# EAGLE board SPEKTRUM_Current_Usage_Sense REV_A (EAGLE 7.1.0)
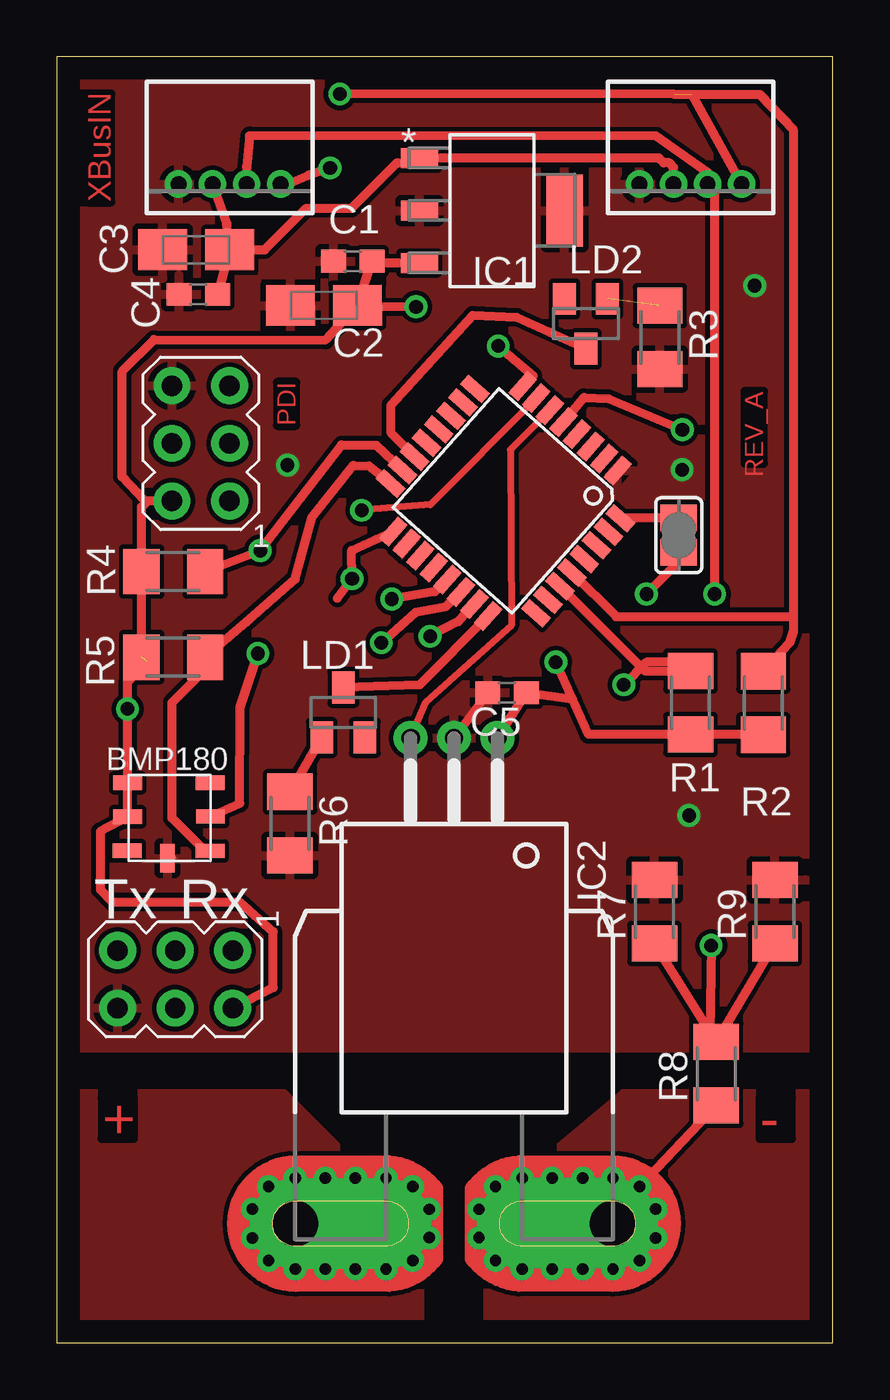
[diagram p0: board, top side]
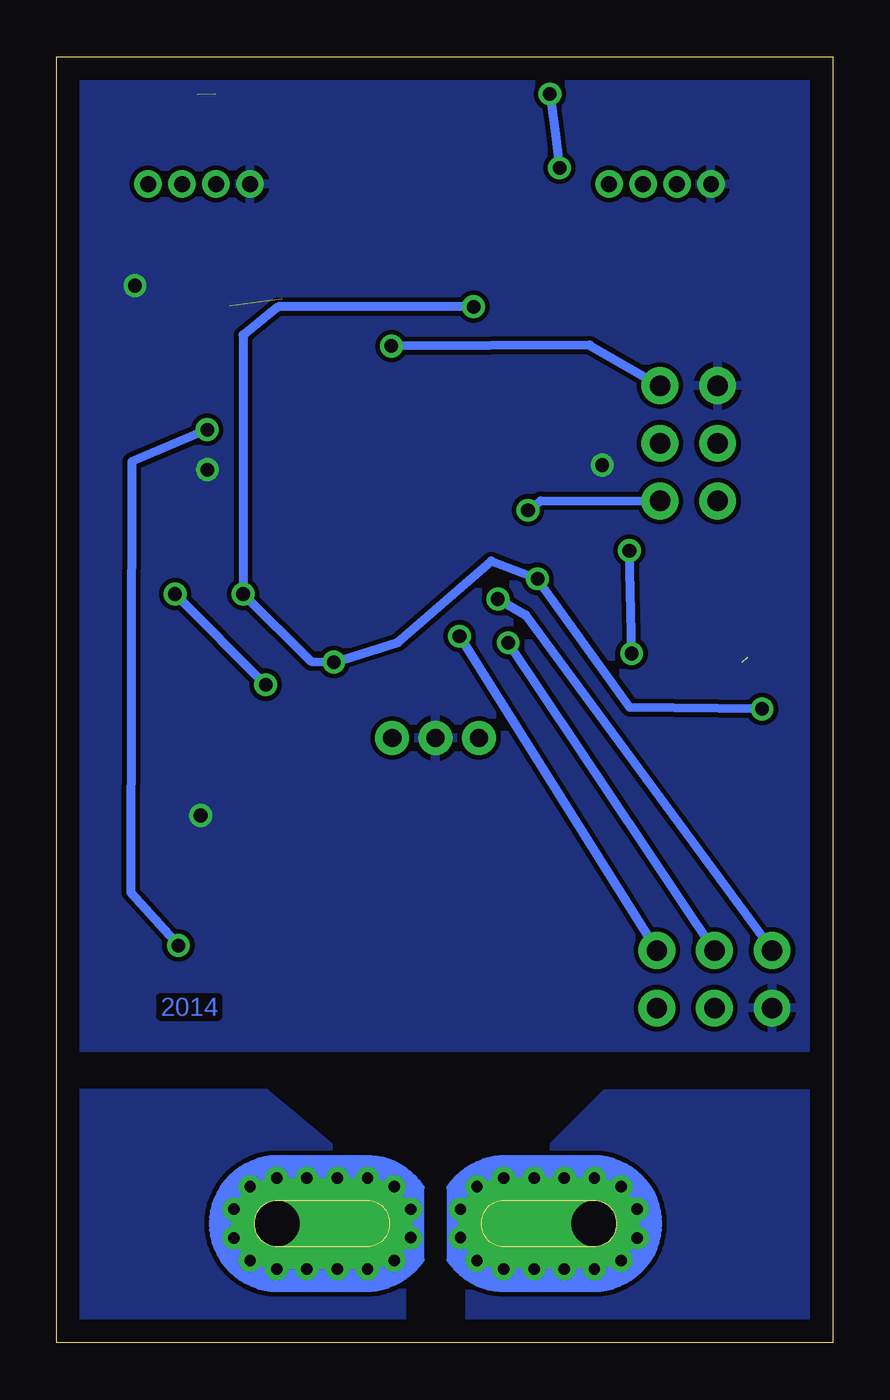
[diagram p1: board, bottom side, seen from below]

Size 34.22 x 56.68 mm. Coordinates in mm from the lower left corner, seen from the top.
Outline: 0,0 34.22,0 34.22,56.68 0,56.68 0,0
Copper layers (1*16): Top 0.035mm / dielectric 1.5mm / Bottom 0.035mm
Design rules "default *": minimum track width 10mil, minimum drill 17mil, track to track 8mil, track to pad 8mil, pad to pad 8mil, via to via 8mil, smd to smd 8mil, copper to edge 40mil, drill to drill 8mil, minimum pad ring 10mil, minimum via ring 8mil, stop-mask expansion 4mil, vias tented up to drill 0mil, thermal gap 10mil

## Footprints (pad centres in the part's own frame; a part is rotated, then mirrored left to right if it is on the bottom)
TQFP32-08 = smd 1.27 x 0.559: 1 -4.293,2.8; 2 -4.293,2; 3 -4.293,1.2; 4 -4.293,0.4; 5 -4.293,-0.4; 6 -4.293,-1.2; 7 -4.293,-2; 8 -4.293,-2.8; 17 4.293,-2.8; 18 4.293,-2; 19 4.293,-1.2; 20 4.293,-0.4; 21 4.293,0.4; 22 4.293,1.2; 23 4.293,2; 24 4.293,2.8 | smd 0.559 x 1.27: 9 -2.8,-4.293; 10 -2,-4.293; 11 -1.2,-4.293; 12 -0.4,-4.293; 13 0.4,-4.293; 14 1.2,-4.293; 15 2,-4.293; 16 2.8,-4.293; 25 2.8,4.293; 26 2,4.293; 27 1.2,4.293; 28 0.4,4.293; 29 -0.4,4.293; 30 -1.2,4.293; 31 -2,4.293; 32 -2.8,4.293
C0603 = smd 1.1 x 1: 1 -0.85,0; 2 0.85,0
A/3216-18W = smd 2.15 x 1.8: + 1.475,0; - -1.475,0
SOT230P700X180-4N = smd 1.626 x 0.889: 1 -3.2,2.311; 2 -3.2,0; 3 -3.2,-2.311 | smd 1.626 x 3.175: 4 3.2,0
CB-PFF = drill 0.8 pad 1.5: 1 -1.91,-21.4; 2 0,-21.4; 3 1.91,-21.4 | drill 2 pad 4 offset: IP+ 7,0; IP- -7,0 | drill 0.5 pad 0.9: IP+@2 8.89,0.635; IP+@3 8.89,-0.635; IP+@4 8.175,-1.625; IP+@5 7,-2; IP+@6 5.675,-2; IP+@7 4.35,-2; IP+@8 3,-2; IP+@9 1.825,-1.625; IP+@10 1.1,-0.625; IP+@11 1.1,0.625; IP+@12 1.825,1.625; IP+@13 3,2; IP+@14 4.35,2; IP+@15 5.675,2; IP+@16 7,2; IP+@17 8.175,1.625; IP-@2 -8.89,0.635; IP-@3 -8.89,-0.635; IP-@4 -8.175,-1.625; IP-@5 -7,-2; IP-@6 -5.675,-2; IP-@7 -4.325,-2; IP-@8 -3,-2; IP-@9 -1.825,-1.625; IP-@10 -1.1,-0.625; IP-@11 -1.1,0.625; IP-@12 -1.825,1.625; IP-@13 -3,2; IP-@14 -4.325,2; IP-@15 -5.675,2; IP-@16 -7,2; IP-@17 -8.175,1.625
AVRISP = drill 0.9 pad 1.626: 1 -1.27,2.54; 2 1.27,2.54; 3 -1.27,0; 4 1.27,0; 5 -1.27,-2.54; 6 1.27,-2.54
SOT23 = smd 1 x 1.4: 1 -0.95,-1.1; 2 0.95,-1.1; 3 0,1.1
M1206 = smd 1.6 x 2: 1 -1.4,0; 2 1.4,0
SJ = smd 1.168 x 1.6: 1 -0.762,0; 2 0.762,0
BMP180_LGA7 = smd 0.635 x 1.27: P1 1.435,-1.975; P2 -0.055,-1.955; P3 -1.555,-1.955; P4 -1.545,1.685; P5 -0.065,1.695; P6 1.455,1.685 | smd 1.27 x 0.635: P7 1.775,-0.195
S4B-ZR = drill 0.7 pad 1.1: 1 -2.25,0; 2 -0.75,0; 3 0.75,0; 4 2.25,0

## Placement (x,y rotation side)
ATXMEGA32E5  [TQFP32-08]  19.78,37.1 228.3 top
C1  100nF  [C0603]  13.05,47.67 180 top
C2  1uF  [A/3216-18W]  11.78,45.72 0.3 top
C3  4.7uF  [A/3216-18W]  6.15,48.17 0 top
C4  100nF  [C0603]  6.24,46.21 180 top
C5  100nF  [C0603]  19.85,28.65 180 top
IC1  MCP1826S-3302E/DB  [SOT230P700X180-4N]  19.19,49.9 0 top
IC2  ACS758LCB-100U-PFF-T  [CB-PFF]  17.52,5.25 180 top
ISP1  AVRISP-6  [AVRISP]  6.35,39.64 180 top
ISP2  AVRISP-6  [AVRISP]  5.22,16.02 270 top
LD1  PL006-WCR21  [SOT23]  12.63,27.78 0 top
LD2  PL006-WCR21  [SOT23]  23.33,44.91 180 top
R1  4.7K  [M1206]  27.94,28.21 270 top
R2  4.7K  [M1206]  31.15,28.2 270 top
R3  [M1206]  26.59,44.31 270 top
R4  4.7K  [M1206]  5.14,33.99 180 top
R5  4.7K  [M1206]  5.14,30.22 180 top
R6  [M1206]  10.28,22.88 270 top
R7  470  [M1206]  26.35,19 90 top
R8  4.7K  [M1206]  29.07,11.86 90 top
R9  470  [M1206]  31.66,19 90 top
SJ1  [SJ]  27.42,35.59 90 top
U$1  BMP180  [BMP180_LGA7]  5.08,23.13 270 top
X-BUS1  S4B-ZR  [S4B-ZR]  7.62,51.07 180 top
X-BUS2  S4B-ZR  [S4B-ZR]  27.94,51.07 180 top

## Library data of the parts
ATXMEGA32E5 = atmega-atxmega
C1-C5 = rcl
IC1 = microchip_ldo; MPN: MCP1826S-3302E/DB; OC_FARNELL: 1578424; OC_NEWARK: 27M0037; PACKAGE: SOT-223-3; SUPPLIER: Microchip
IC2 = allegro; MPN: ACS758LCB-100U-PFF-T; OC_FARNELL: 1718998; OC_NEWARK: 04R7132
ISP1 ISP2 = adafruit
LD1 LD2 = led
R1-R9 = resistor; SPICEPREFIX: R
SJ1 = jumper
U$1 = bosch_sensors
X-BUS1 X-BUS2 = con-jst; MF: FARNELL; MPN: S4B-ZR(LF)(SN); OC_FARNELL: 9491830; OC_NEWARK: 38K8076

## Nets
GND: ATXMEGA32E5.1 ATXMEGA32E5.18 C1.2 C2.- C3.- C4.2 C5.2 IC1.2 IC1.4 IC2.2 ISP1.6 ISP2.6 R3.2 R6.2 R7.2 R9.2 U$1.P7 X-BUS1.4 X-BUS2.4
N$1: ATXMEGA32E5.6 IC2.3
N$2: C3.+ C4.1 IC1.1 X-BUS1.3 X-BUS2.3
N$3: LD2.1 R3.1
N$4: ATXMEGA32E5.27 R1.1 X-BUS1.2 X-BUS2.2
N$5: ATXMEGA32E5.28 R2.1 X-BUS1.1 X-BUS2.1
N$6: LD1.1 R6.1
N$7: ATXMEGA32E5.14 LD2.3
N$10: ATXMEGA32E5.16 R5.1 U$1.P6
N$11: ATXMEGA32E5.15 R4.1 U$1.P5
N$12: ATXMEGA32E5.7 ISP1.1
N$13: ATXMEGA32E5.8 ISP1.5
N$14: ATXMEGA32E5.24 LD1.3
N$15: ATXMEGA32E5.32 SJ1.2
N$16: IC2.IP- IC2.IP-@2 IC2.IP-@3 IC2.IP-@4 IC2.IP-@5 IC2.IP-@6 IC2.IP-@7 IC2.IP-@8 IC2.IP-@9 IC2.IP-@10 IC2.IP-@11 IC2.IP-@12 IC2.IP-@13 IC2.IP-@14 IC2.IP-@15 IC2.IP-@16 IC2.IP-@17 R8.1
N$17: ATXMEGA32E5.5 R7.1 R8.2 R9.1
N$22: ATXMEGA32E5.21 ISP2.5
N$23: ATXMEGA32E5.22 ISP2.3
N$24: ATXMEGA32E5.23 ISP2.1
VCC: ATXMEGA32E5.17 C1.1 C2.+ C5.1 IC1.3 IC2.1 ISP1.2 ISP2.2 R1.2 R2.2 R4.2 R5.2 SJ1.1 U$1.P2 U$1.P3

## Tracks (layer width: path | path; a pad name or v marks a point on that pad's centre or on a via)
G41.IP-
  pour Top: 25,11 34,11 34,0 19,0 19,6
G$1.IP+
  pour Top: 10,11 16,5 16,0 0,0 0,11
GND  (via drill 0.6)
  Top 0.406: U$1.P7 5.08,21.36 | C5.2 IC2.2
  other vias: 27.87,23.24 10.17,38.68 27.57,38.48 30.77,46.59
  pour Bottom: 0,57 0,13 35,13 35,57
  pour Top: 0,56.69 0,13 34.55,13 34.55,56.69
N$1
  Top 0.305: ATXMEGA32E5.6 20,39.36 20.04,31.62 16.27,28.21 IC2.3
N$2
  Top 0.406: X-BUS1.3 7.5,49.34 C3.+ | C3.+ C4.1 | 15.85,52.35 IC1.1 | X-BUS2.3 27.19,51.81 27,52 26.76,52 26.55,52.21 IC1.1 | C3.+ 9.17,48.17 11,50 13,50 15,52 15.78,52 IC1.1
N$3  (1 unrouted)
N$4  (via drill 0.6)
  Top 0.406: X-BUS1.2 8.37,51.82 8.5,53.19 26.43,53.18 28.69,51.59 X-BUS2.2 29,51 v29,33 | ATXMEGA32E5.27 25.93,29.61 R1.1 27,30 26,30 v25,29
  Bottom 0.406: v29,33 v25,29
N$5  (via drill 0.6)  (1 unrouted)
  Top 0.406: R2.1 32.3,30.84 32.48,31.36 32.48,32 | ATXMEGA32E5.28 24.66,32 32.48,32 | 30.07,51.07 X-BUS2.1 28,55 | X-BUS1.1 10,51 11.11,51.46 v12.05,51.78 | v12.48,55.04 27.23,55.02 31,55.02 31,55 32.47,53.47 32.48,32
  Bottom 0.406: v12.05,51.78 12.25,53.44 v12.48,55.04
N$6
  Top 0.406: LD1.1 R6.1
N$7
  Top 0.254: 15.77,39.23 ATXMEGA32E5.14
  Top 0.406: ATXMEGA32E5.14 14.74,40.1 14.74,41.34 14.75,41.34 18.35,45.29 20.27,45.2 LD2.3
N$8
  pour Bottom: 0,11 0,0 16,0 16,5 10,11
N$9
  pour Bottom: 19,0 19,6 25,11 34,11 34,0
N$10
  Top 0.406: U$1.P6 6.54,21.68 5.08,23.13 5.08,28.21 6.54,29.67 R5.1 8.35,31.76 10.51,33.65 11.25,36.39 13.07,38.67 13.76,38.64 14.58,38 ATXMEGA32E5.16
N$11  (via drill 0.6)
  Top 0.406: ATXMEGA32E5.15 14.08,39.55 12.55,39.57 v8.97,34.91 R4.1 | U$1.P5 8.06,23.77 8.08,28 v8.87,30.38
  Bottom 0.406: v8.87,30.38 v8.97,34.91
N$12  (via drill 0.6)
  Top 0.254: 21.03,41.52 ATXMEGA32E5.7
  Top 0.305: 21.03,41.52 16.47,36.94 v13.44,36.69
  Bottom 0.254: 7.77,37.18 ISP1.1
  Bottom 0.406: v13.44,36.69 12.87,37.11 ISP1.1
N$13  (via drill 0.6)
  Top 0.406: v19.46,43.93 21,42.62 ATXMEGA32E5.8
  Bottom 0.406: v19.46,43.93 10.73,43.98 ISP1.5
N$14
  Top 0.406: ATXMEGA32E5.24 16,29 LD1.3
N$15
  Top 0.406: SJ1.2 24.86,36.35 ATXMEGA32E5.32
N$16
  Top 0.406: R8.1 IC2.IP-@4
N$17  (via drill 0.6)
  Top 0.406: 28.79,13.71 R8.2 R9.1 | 28.79,13.71 R7.1 | ATXMEGA32E5.5 23.25,41.66 24.32,41.61 v27.58,40.24 | v28.85,17.51 28.79,13.71
  Bottom 0.406: v27.58,40.24 30.9,38.83 30.95,19.85 v28.85,17.51
N$18
  Bottom 0.406: 21.99,29.98 19.19,30.86 15.06,34.46 12.97,33.65
N$22  (via drill 0.6)
  Top 0.406: ATXMEGA32E5.21 16.67,33.1 v14.77,32.78
  Bottom 0.406: v14.77,32.78 13.55,32.08 ISP2.5
N$23  (via drill 0.6)
  Top 0.406: ATXMEGA32E5.22 17.13,32.43 15.82,32.19 v14.31,30.85
  Bottom 0.406: v14.31,30.85 ISP2.3
N$24  (via drill 0.6)
  Top 0.406: ATXMEGA32E5.23 17.69,31.78 v16.46,31.14
  Bottom 0.406: v16.46,31.14 ISP2.1
VCC  (via drill 0.6)  (1 unrouted)
  Top 0.406: R2.2 R1.2 23.44,26.81 22.74,28.37 | ATXMEGA32E5.17 13,34.92 v13.02,33.67 12.38,32.82 | SJ1.1 27.42,34.42 v26,33 | 3.12,29.12 U$1.P3 U$1.P2 1.92,22.53 1.92,19.97 2.44,19.44 8.06,19.42 9.54,18.11 9.54,15.66 ISP2.2 | 3.12,29.12 4,30 | ISP1.2 4,37.1 | 4,37.1 3.9,37.1 2.88,38.17 2.89,42.82 4.29,44.22 11.85,44.2 C2.+ | 4,37.1 3.74,36.84 R4.2 R5.2 3.74,33.74 4,34 | C2.+ C1.1 14.22,47.59 IC1.3 | v15.84,45.66 12.82,45.65 C2.+ | v3.12,27.94 3.12,29.12 | 22.74,28.37 v22,30 | IC2.1 C5.1 22.74,28.37
  Bottom 0.406: v3.12,27.94 8.95,28 v13.02,33.67 | v22,30 23,30.03 v26,33 26,44.41 24.45,45.66 v15.84,45.66

## Text on the board
Top: XBusIN | REV_A | PDI | + | -
Bottom: 2014
tNames: Tx | Rx